# Altium PCB 5v_4V.PcbDoc
Units mm, origin at the board's own origin, x right, y up, seen from the top; angles counter-clockwise.
Board outline 42.16 x 23.62 mm, 2 copper layers (Top Layer, Bottom Layer); 20 components, 8 nets, 44 pads, 4 vias.
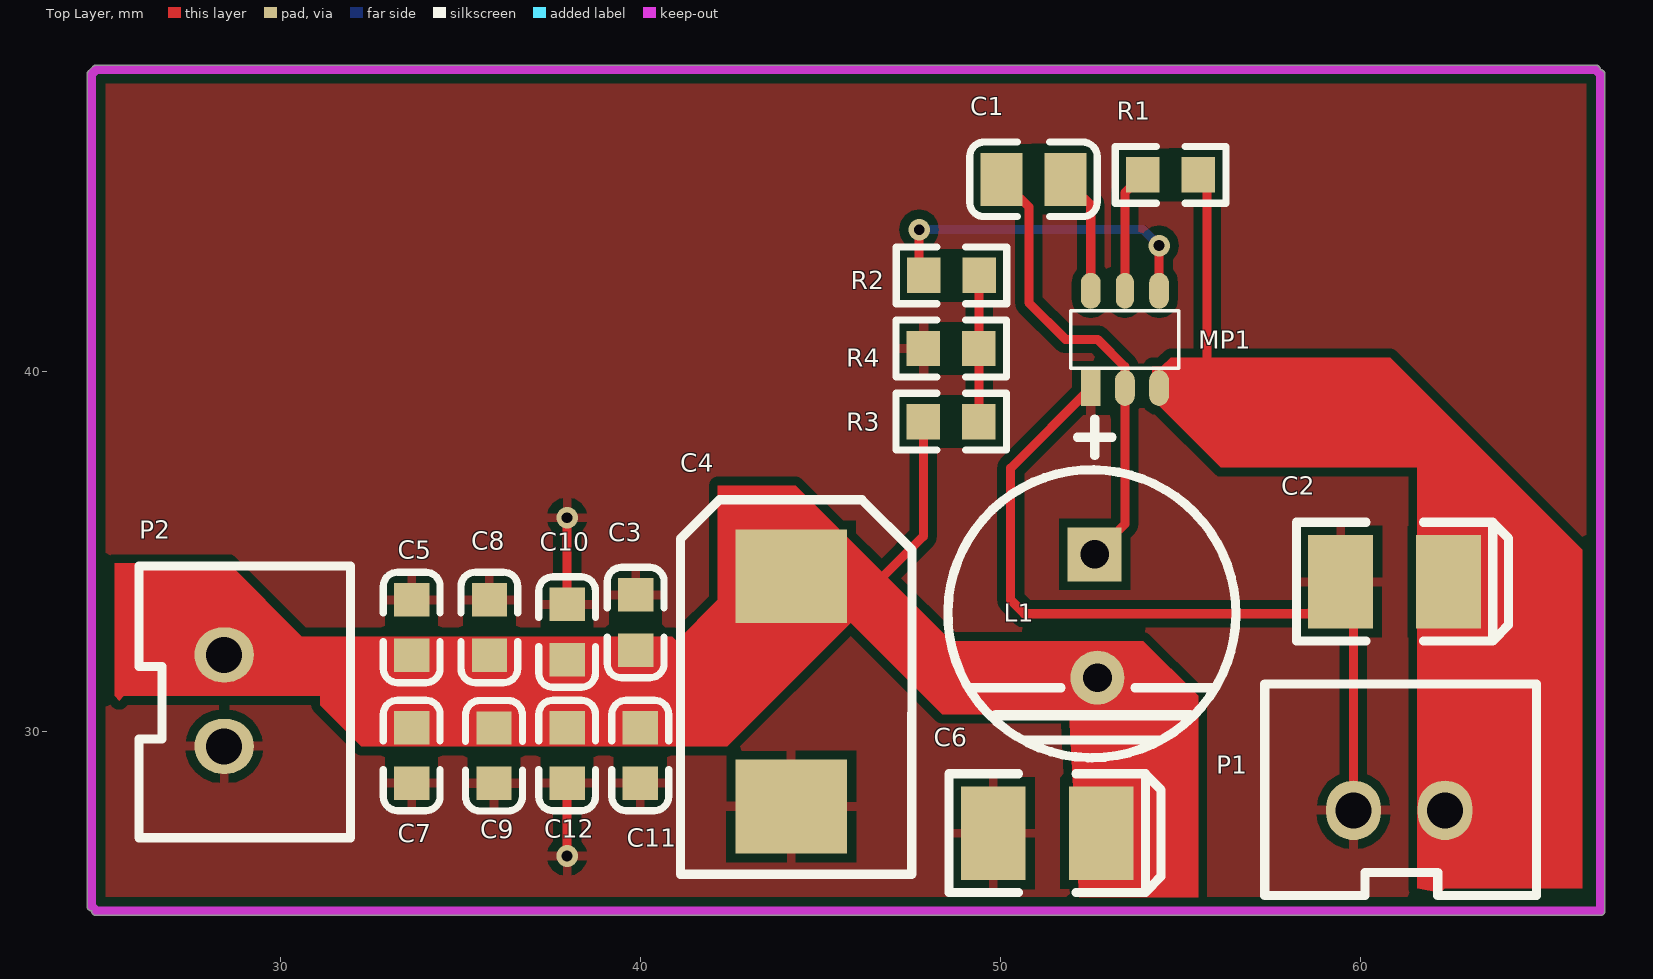
[diagram p0: Top Layer view]
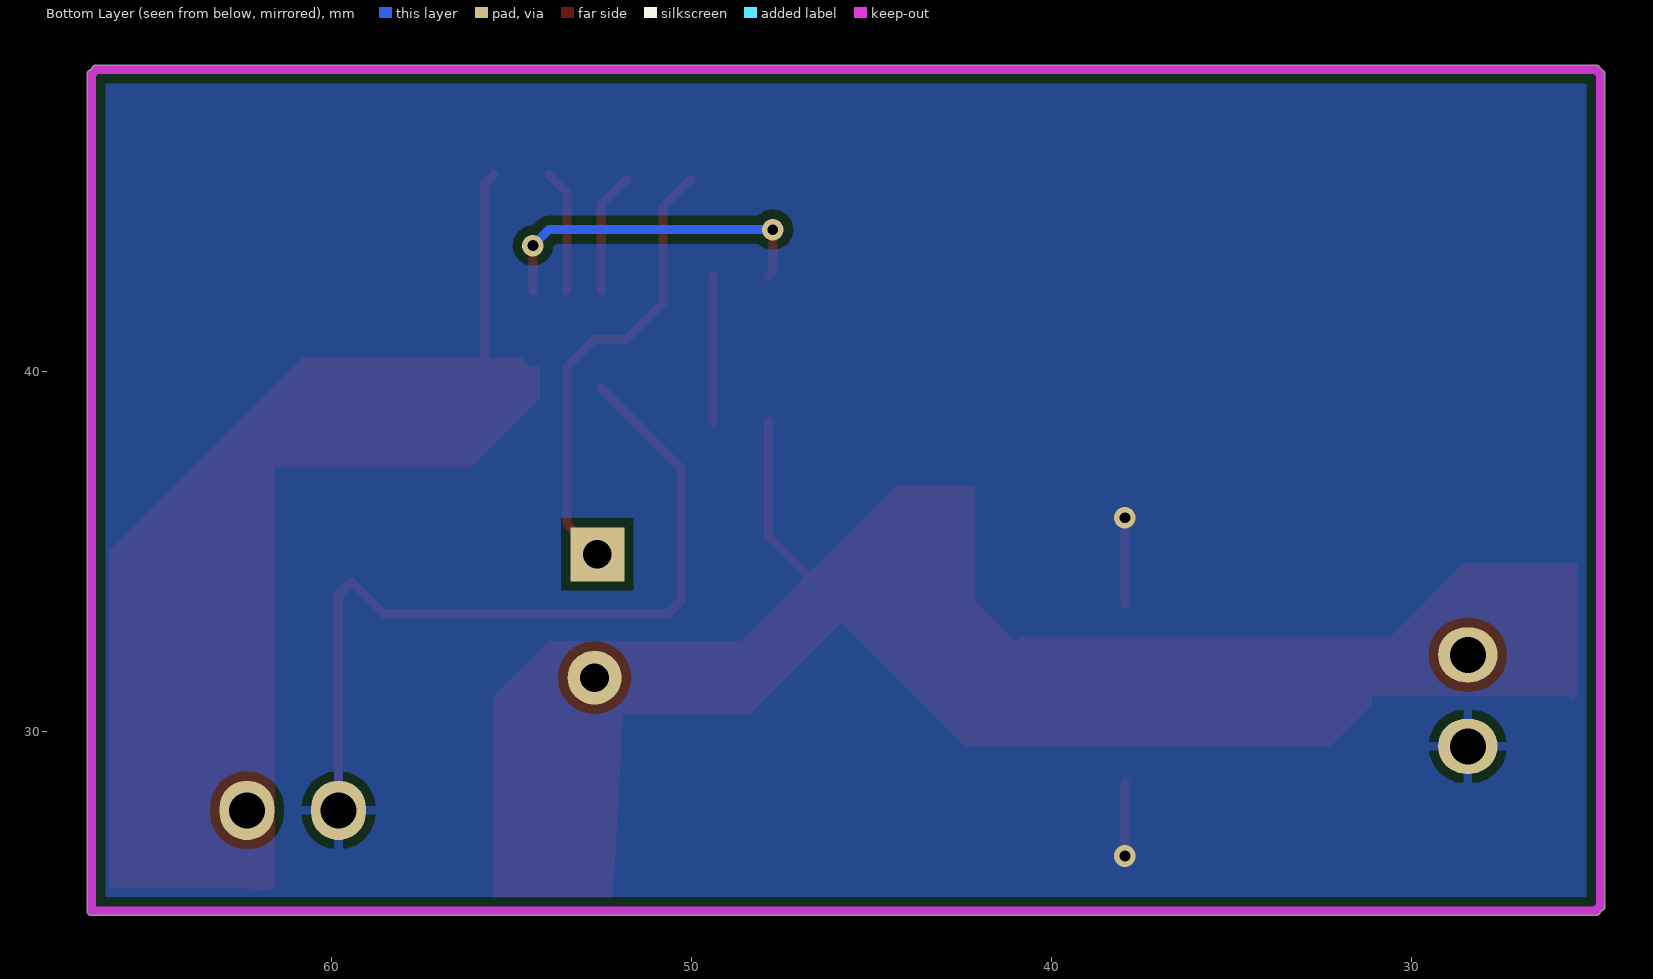
[diagram p1: Bottom Layer view, seen from below]
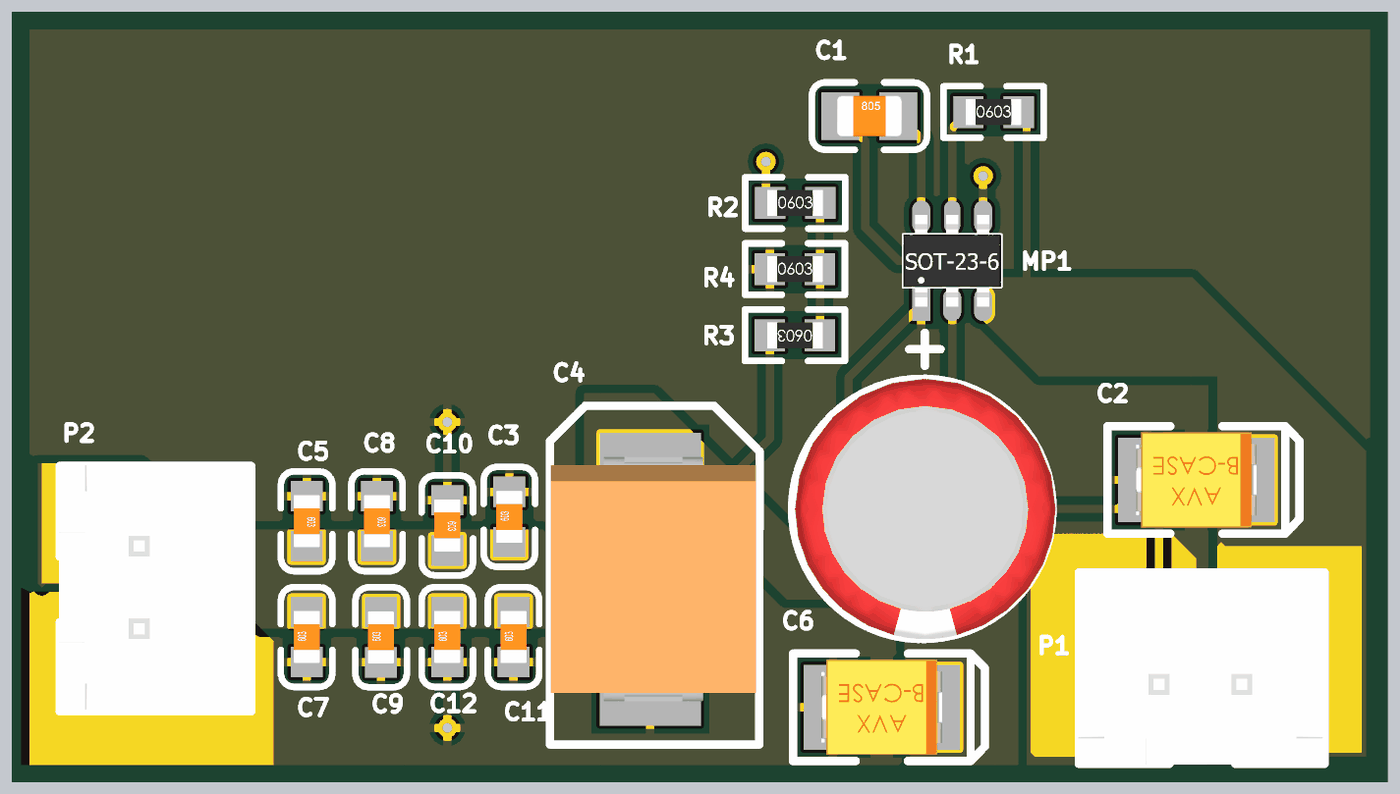
[diagram p2: 3D render of the assembled board from above, using the file's embedded part models]

## Layer stack, top to bottom
Top Solder: solder mask 0.0102, Solder Resist, Dk 3.5
Top Layer: signal copper 0.0356
Dielectric 1: dielectric 0.32, FR-4, Dk 4.8
Bottom Layer: signal copper 0.0356
Bottom Solder: solder mask 0.0102, Solder Resist, Dk 3.5

## Board outline
24.638,25.146 24.638,48.26 cw(c24.765,48.26) 24.675,48.351 24.675,48.35 24.802,48.477 24.801,48.477 cw(c24.892,48.387) 24.892,48.514 66.548,48.514 cw(c66.548,48.387) 66.675,48.387 cw(c66.675,48.26) 66.802,48.26 66.802,25.019 cw(c66.675,25.019) 66.675,24.892 24.892,24.892 cw(c24.892,25.019) 24.765,25.019 cw(c24.765,25.146)

## Design rules (kind name [scope] priority, off if disabled: settings)
Clearance [All] p1: gap=0.254
PolygonConnect [All] p1: connectstyle=Relief reliefconductorwidth=0.254 reliefentries=4 polygonreliefangle="90 Angle" airgapwidth=0.254
RoutingVias [All] p1: holewidth=0.711 width=1.27 viastyle="Through Hole" minholewidth=0.3 minwidth=0.6 maxholewidth=0.711 maxwidth=1.27
SolderMaskExpansion [All] p1: expansion=0.102
Width [All] p1: maxlimit=0.254 minlimit=0.254 preferedwidth=0.254
30 further rules are at their usual default settings.

## Components (designator, comment, footprint, x,y, rotation, side; value= is the part's Value field where it differs from the comment)
C1 "10uF (106) 10% 25V" 0805_C 50.927,45.339 r0 top
C2 "100uF (107) ±10% 6.3V" CASE-B_3528 60.96,34.163 r0 top
C3 "10uF (106) 10% 10V" 0603_C 39.878,33.028 r90 top
C4 "Cap Pol1" C7361 44.196,31.115 r270 top
C5 "100nF (104) 10% 50V" 0603_C 33.655,32.893 r270 top
C6 "100uF (107) ±10% 6.3V" CASE-B_3528 51.308,27.178 r0 top
C7 "33pF (330) 5% 50V" 0603_C 33.655,29.337 r90 top
C8 "33pF (330) 5% 50V" 0603_C 35.814,32.893 r270 top
C9 "33pF (330) 5% 50V" 0603_C 35.941,29.329 r90 top
C10 "8.2pF (8R2) 0.25pF 50V" 0603_C 37.973,32.766 r270 top
C11 "10pF (100) 5% 50V" 0603_C 40.005,29.337 r90 top
C12 "33pF (330) 5% 50V" 0603_C 37.973,29.337 r90 top
L1 "4.7uH ±10%" C8X10 52.642,33.172 r270 top
MP1 "MP1470" SOT-23-6M 53.467,40.894 r0 top
P1 "HDR-1X2" XH2.54-2 59.817,27.813 r180 top
P2 "HDR-1X2" XH2.54-2 28.448,32.131 r90 top
R1 "75KΩ (7502) ±1%" 0603_R 54.737,45.466 r0 top
R2 "75KΩ (7502) ±1%" 0603_R 48.649,42.672 r0 top
R3 "47KΩ (4702) ±1%" 0603_R 48.641,38.608 r180 top
R4 "12KΩ (1202) ±1%" 0603_R 48.641,40.64 r0 top

## Footprints (in the part's own frame and the unit in brackets; to place one, negate y for a bottom-side part, rotate by r counter-clockwise, add the part's x,y. Pads: shape width x height; smd on the part's side, far side on the other; paste and mask are expansions set on the pad)
0603_C [mm]
  rect 0.93x0.98 smd: 1(-0.77,0) 2(0.77,0)
  silkscreen extent -1.53,-0.79 1.54,0.79, body extent -0.8,-0.4 0.8,0.4, height 0.3
0603_R [mm]
  rect 0.93x0.98 smd: 1(-0.77,0) 2(0.77,0)
  silkscreen extent -1.53,-0.79 1.54,0.79, body extent -0.85,-0.4 0.85,0.4, height 0.56
0805_C [mm]
  rect 1.16x1.47 smd: 1(-0.89,0) 2(0.89,0)
  silkscreen extent -1.77,-1.04 1.77,1.04, body extent -1,-0.62 1,0.63, height 0.77
C8X10 [mm]
  rect 1.5x1.5 hole 0.8: 1(-1.753,-0.013)
  round 1.5 hole 0.8: 2(1.676,0.064)
  silkscreen extent -5.51,-4.09 3.9,3.91, body extent -4.1,-4 3.9,4, height 11.74
C7361 [mm] "D型"
  rect 2.6x3.1 smd: 1(-3.202,0.007) 2(3.198,0.007)
  silkscreen extent -5.33,-3.07 5.08,3.36, body extent -3.75,-3.05 3.75,3.25, height 3.45
CASE-B_3528 [mm]
  rect 1.8x2.6 smd: 1(1.5,0) 2(-1.5,0)
  silkscreen extent -2.73,-1.65 3.16,1.65, body extent -1.85,-1.47 1.85,1.46, height 2.03
SOT-23-6M [mm]
  rect 0.55x1 smd: 1(-0.95,-1.35)
  oval 0.55x1 smd: 2(0,-1.35) 3(0.95,-1.35) 4(0.95,1.35) 6(-0.95,1.35)
  oval 0.5x1 smd: 5(0,1.35)
  silkscreen extent -1.5,-0.8 1.5,0.8, body extent -1.5,-1.4 1.5,1.4, height 0.86
XH2.54-2 [mil]
  oval 60x65 hole 39.37: 1(0,0) 2(-100.1,0)
  silkscreen extent -200,-138 97,93, body extent -198,-142 98,94, height 276

## Part data
C1: library part "0805 10uF (106) 10% 25V", "贴片电容"
C2 C6: library part "3528 100uF (107) 10% 6.3V", "钽电容"
C3: library part "0603 10uF (106) 10% 10V", "贴片电容"
C4: "Polarized Capacitor (Radial)"
C5: library part "0603 100nF (104) 10% 50V", "贴片电容"
C7 C8 C9 C12: library part "0603 33pF (330) 5% 50V", "贴片电容"
C10: library part "0603 8.2pF (8R2) 0.25pF 50V", "贴片电容"
C11: library part "0603 10pF (100) 5% 50V", "贴片电容"
L1: library part "0603 4.7uH 10%", "贴片电感"
P1 P2: library part "Header 2", "2P接插件"
R1 R2: library part "0603 75KΩ (7502) 1%", "贴片电阻"
R3: library part "0603 47KΩ (4702) 1%", "贴片电阻"
R4: library part "0603 12KΩ (1202) 1%", "贴片电阻"

## Via types
v1: diameter 0.6, hole 0.3, Top Layer to Bottom Layer, 4 vias

## Nets (pads, with @x,y where several pads share a name; then routed paths per layer and width w, separated by ;. In a path a pad name is that pad's centre, name@x,y a point inside that pad or via, vN(x,y) a via of type N, cw(c..) or ccw(c..) an arc to the next point about the centre after c; other vN are vias at no path point)
+4V: C3.1 C4.1 C5.2 C6.1 C7.2 C8.2 C9.2 C10.2 C11.2 C12.2 L1.2 P2.1 R3.2 | length 5.5
  Top Layer w0.254: 46.228,33.782 47.871,35.425 R3.2
+5V: C2.1 MP1.3 P1.2 R1.2 | length 6.3
  Top Layer w0.254: R1.2 55.753,45.22 55.753,39.243
GND: C2.2 C3.2 C4.2 C5.1 C6.2 C7.1 C8.1 C9.1 C10.1 C11.1 C12.1 MP1.1 P1.1 P2.2 R4.1 | length 27.4
  Top Layer w0.254: v1(37.973,26.543) C12.1 ; C10.1 v1(37.973,35.941) ; MP1.1 50.292,37.319 50.292,33.655 50.673,33.274 58.571,33.274 C2.2 59.817,33.806 P1.1
NetC1_1: C1.1 L1.1 MP1.2 | length 12.7
  Top Layer w0.254: C1.1 50.8,44.576 50.8,41.91 51.816,40.894 52.705,40.894 53.467,40.132 MP1.2 53.467,35.763 L1.1
NetC1_2: C1.2 MP1.6 | length 3.4
  Top Layer w0.254: C1.2 52.517,44.639 MP1.6
NetMP1_4: MP1.4 R2.1 | length 9.4
  Top Layer w0.254: v1(47.752,43.942) 47.752,42.799 R2.1 ; MP1.4 v1(54.417,43.5)
  Bottom Layer w0.254: v1(47.752,43.942) 53.975,43.942 v1(54.417,43.5)
NetMP1_5: MP1.5 R1.1 | length 3.4
  Top Layer w0.254: MP1.5 53.467,44.966 R1.1
NetR2_2: R2.2 R3.1 R4.2 | length 4.1
  Top Layer w0.254: R3.1 49.419,38.616 R2.2

## Polygon pours and split planes (outlines as drawn)
GND on Bottom Layer "Top Overlay-No Net" (solid, pour order 0): 25.146,48.387 66.548,48.387 66.675,48.26 66.675,25.019 66.548,25.146 24.765,25.146 24.765,25.4 24.765,48.26
GND on Top Layer "Top Overlay-No Net" (solid, pour order 4): 24.892,48.387 25.019,48.26 66.675,48.26 66.675,25.527 66.421,25.273 25.019,25.273 24.765,25.527 24.765,48.006

## Keep-outs
Keep-Out Layer:
  lines w0.254: 24.765,25.146 24.892,25.019 25.4,25.019 66.675,25.019 66.675,48.26 66.548,48.387 25.4,48.387 24.892,48.387 24.765,48.26 24.765,25.146

## Other copper
Top Layer:
  region net +4V: 52.451,32.512 48.641,32.512 44.323,36.83 42.164,36.83 42.164,33.655 41.021,32.512 40.894,32.639 30.607,32.639 28.575,34.671 25.4,34.671 25.4,30.988 25.527,30.861 25.654,30.988 31.115,30.988 31.115,30.734 32.258,29.591 42.418,29.591 45.847,33.02 48.387,30.48 52.832,30.48
  region net +4V: 52.197,25.4 55.499,25.4 55.499,30.988 53.975,32.512 51.816,32.512
  region net +5V: 62.23,25.527 62.357,25.654 66.167,25.654 66.167,35.052 60.833,40.386 54.737,40.386 54.483,40.132 54.229,40.132 54.229,39.243 56.134,37.338 61.595,37.338 61.595,25.654

## Silkscreen, mask and mechanical layers (free items; w line width, h text height)
Top Solder:
  rectangle: 25.527,30.988 28.448,34.671
  region: 61.722,32.258 61.849,32.131 66.04,32.131 66.04,25.781 61.595,25.781 61.595,32.131
  region: 60.198,32.512 60.96,31.75 60.96,25.654 56.007,25.654 55.88,25.781 55.88,32.512
  region: 28.448,34.544 30.099,32.893 30.099,31.369 27.813,31.369
  region: 25.146,30.734 31.115,30.734 32.639,29.21 32.639,25.4 24.892,25.4 24.892,30.861